# EAGLE board Prototype3 (EAGLE 7.1.0)
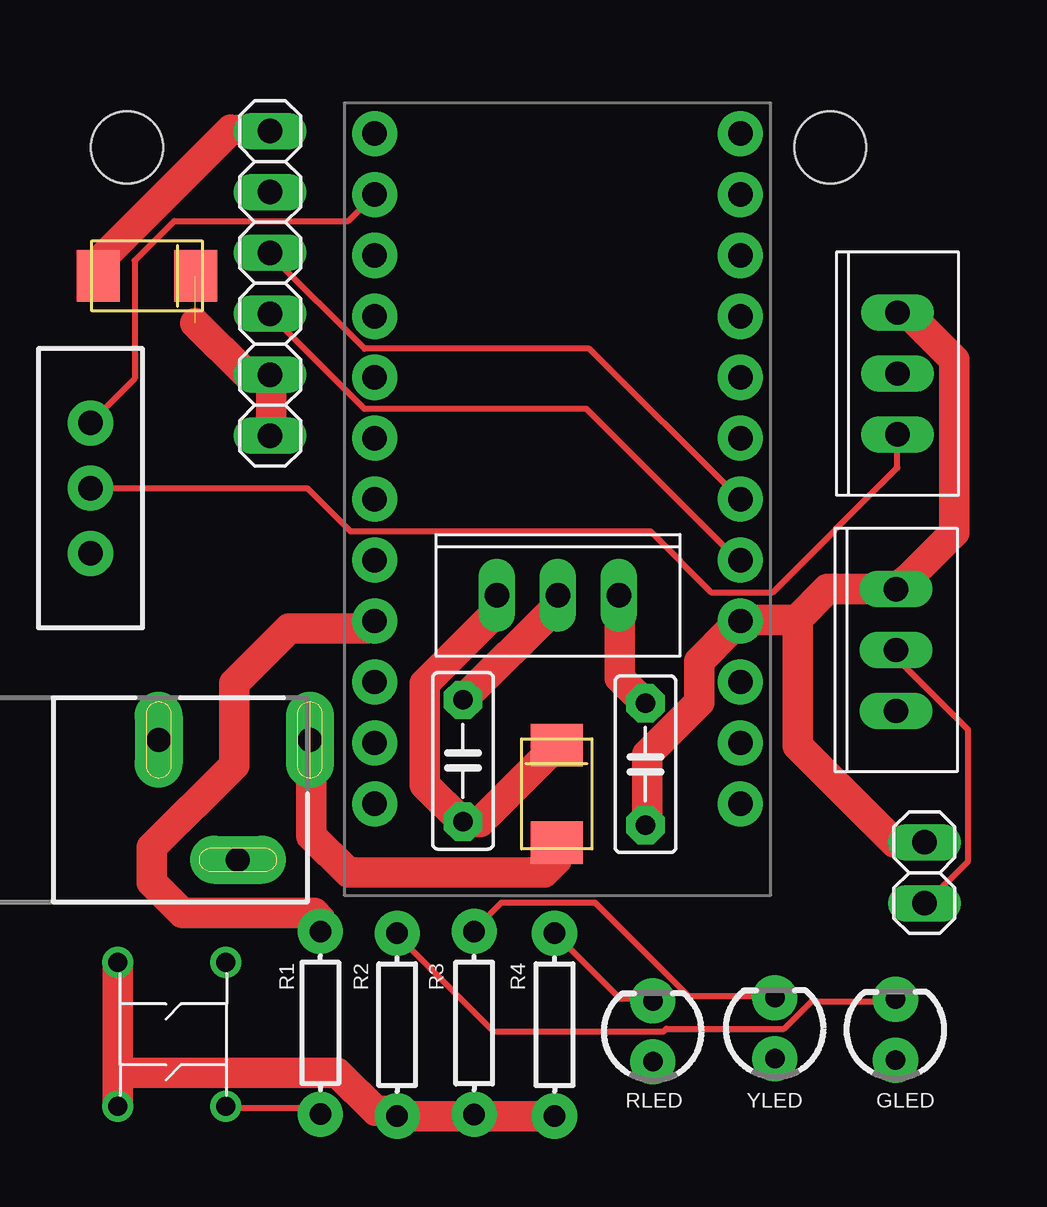
[diagram p0: board, top side]
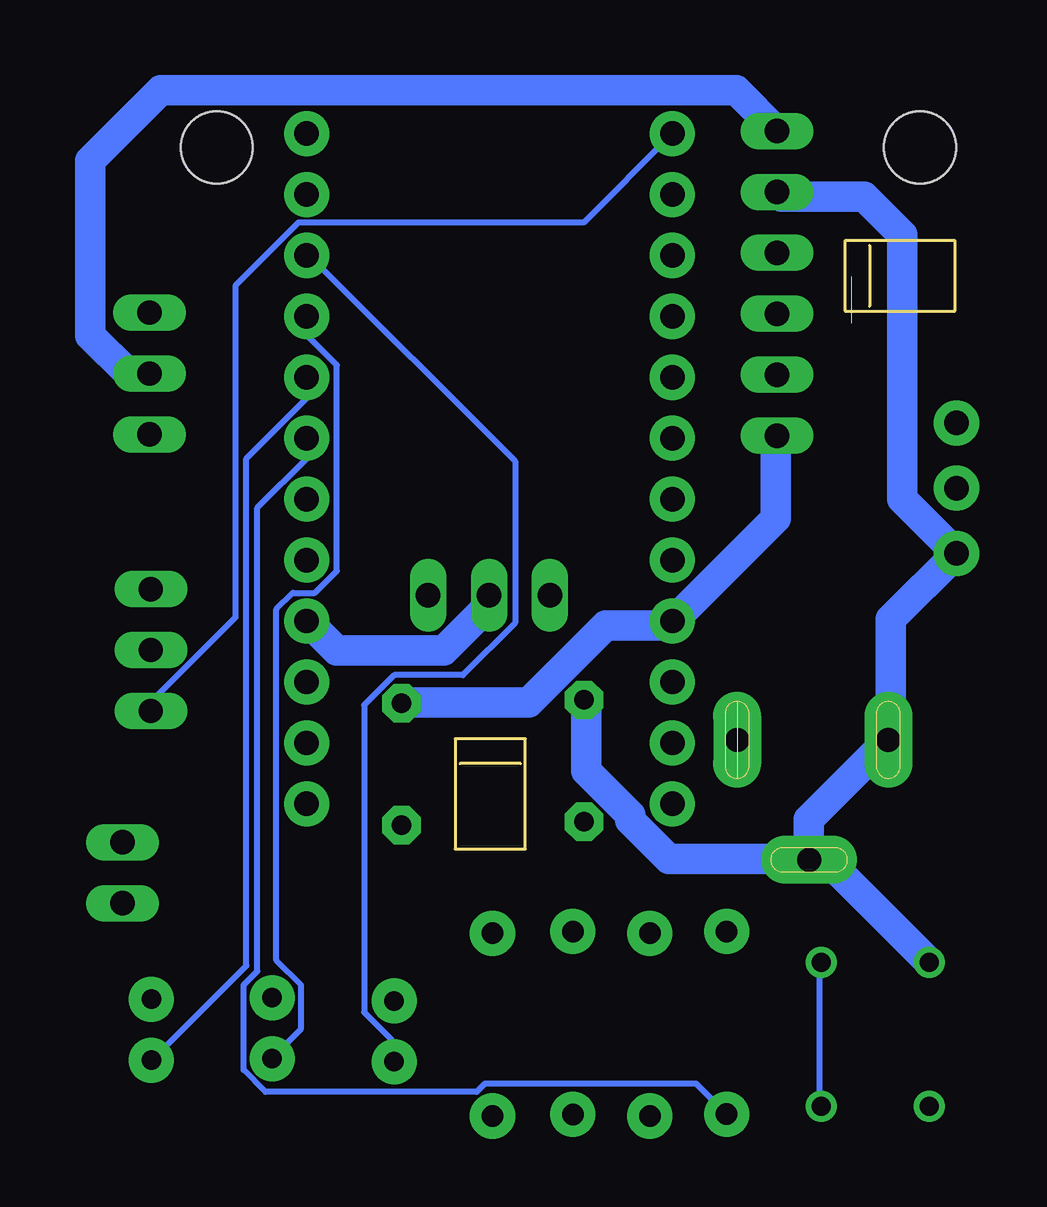
[diagram p1: board, bottom side, seen from below]

Size 20.83 x 25.36 mm. Coordinates in mm from the lower left corner, seen from the top.
Copper layers (1*16): Top 0.035mm / dielectric 1.5mm / Bottom 0.035mm
Design rules "default *": minimum track width 10mil, minimum drill 24mil, track to track 8mil, track to pad 4mil, pad to pad 8mil, via to via 8mil, smd to smd 8mil, copper to edge 0mil, drill to drill 8mil, minimum pad ring 10mil, minimum via ring 8mil, stop-mask expansion 4mil, vias tented up to drill 0mil, thermal gap 10mil
Net classes: 0 default: width 0.254 mm; 1 Power: width 1.27 mm
Holes 3 mm at 1.47,29.26 30.77,29.26

## Footprints (pad centres in the part's own frame; a part is rotated, then mirrored left to right if it is on the bottom)
C5B2.5 = drill 0.813 pad 1.6 octagon: 1 -2.54,0; 2 2.54,0
SMD-DIODE = smd 1.778 x 2.159: P$1 -2.032,0; P$2 2.032,0
LED3MM = drill 0.813 pad 1.88: A -1.27,0; K 1.27,0
TO-220(2) = drill 1.016 long: GND 0,0; IN -2.54,0; OUT 2.54,0
POWER_JACK_SLOT = drill 1 pad 2 long: GND@1 2.58,7.5; GND@2 7.58,10.8; PWR 2.58,13.8
1X02 = drill 1.016 long: 1 -1.27,0; 2 1.27,0
1X06 = drill 1.016 long: 1 -6.35,0; 2 -3.81,0; 3 -1.27,0; 4 1.27,0; 5 3.81,0; 6 6.35,0
AXIAL-0.3 = drill 0.9 pad 1.88: P$1 -3.81,0; P$2 3.81,0
SWITCH-SPDT_KIT = drill 1.016 pad 1.88: 1 0,2.718; 2 0,0; 3 0,-2.718
ARDUINO_MINI = drill 1.016 pad 1.88: 1 -7.62,12.7; 2 -7.62,10.16; 3 -7.62,7.62; 4 -7.62,5.08; 5 -7.62,2.54; 6 -7.62,0; 7 -7.62,-2.54; 8 -7.62,-5.08; 9 -7.62,-7.62; 10 -7.62,-10.16; 11 -7.62,-12.7; 12 -7.62,-15.24; 13 7.62,-15.24; 14 7.62,-12.7; 15 7.62,-10.16; 16 7.62,-7.62; 17 7.62,-5.08; 18 7.62,-2.54; 19 7.62,0; 20 7.62,2.54; 21 7.62,5.08; 22 7.62,7.62; 23 7.62,10.16; 24 7.62,12.7
PUSHBTTN = drill 0.8: P$1 2,-3; P$2 -2.5,-3; P$3 -2.5,3; P$4 2,3

## Placement (x,y rotation side)
C1  0.1uF  [C5B2.5]  23.07,3.54 270 top
C2  0.33uF  [C5B2.5]  15.47,3.68 90 top
D1  SCHOTTKY-DIODE  [SMD-DIODE]  19.37,2.3 90 top
GLED  [LED3MM]  33.49,-7.52 90 top  (outside the outline)
IC1  LM7805  [TO-220(2)]  19.42,10.58 0 top
J1  POWER_JACKSLT  [POWER_JACK_SLOT]  -4.71,7.13 270 top
JACK  [1X02]  34.69,-0.98 90 top  (outside the outline)
JP2  [1X06]  7.43,23.59 90 top
R1  [AXIAL-0.3]  9.53,-7.24 270 top  (outside the outline)
R2  [AXIAL-0.3]  12.72,-7.31 90 top  (outside the outline)
R3  [AXIAL-0.3]  15.93,-7.24 90 top  (outside the outline)
R4  [AXIAL-0.3]  19.28,-7.31 90 top  (outside the outline)
RLED  [LED3MM]  23.38,-7.59 90 top  (outside the outline)
S1  [SWITCH-SPDT_KIT]  -0.06,15.05 180 top
U$1  SCHOTTKY-DIODE  [SMD-DIODE]  2.3,23.9 0 top
U$2  ARDUINO_MINI  [ARDUINO_MINI]  19.4,14.59 180 top
U$3  PUSH-BUTTON  [PUSHBTTN]  3.08,-7.72 180 top  (outside the outline)
U$4  IRLZ34  [TO-220(2)]  33.57,19.82 90 top  (outside the outline)
U$5  IRLZ34  [TO-220(2)]  33.52,8.3 90 top  (outside the outline)
YLED  [LED3MM]  28.46,-7.46 90 top  (outside the outline)

## Library data of the parts
C1 C2 = capacitor-wima
D1 IC1 U$1 U$3-U$5 = gripper-lib
GLED RLED YLED = SparkFun-LED
J1 R1-R4 U$2 = SparkFun
JACK JP2 = pinhead
S1 = SparkFun-Electromechanical; PROD_ID: SWCH-08261

## Nets
CH_A: JP2.3 U$2.5
CH_B: JP2.4 U$2.6
GND [Power]: C1.2 C2.2 IC1.GND J1.GND@1 J1.GND@2 JACK.2 JP2.5 R2.P$1 R3.P$1 R4.P$1 S1.1 U$2.4 U$3.P$1 U$3.P$4 U$4.OUT U$5.OUT
J_PWM: U$2.13 U$5.IN
M- [Power]: JP2.6 U$1.P$1 U$4.GND
M_PWM: S1.3 U$2.14
N$1: JACK.1 U$5.GND
N$2: D1.P$1 J1.PWR
N$3: S1.2 U$4.IN
N$5 [Power]: C2.1 D1.P$2 IC1.IN
N$12: R4.P$2 RLED.K
N$13: R3.P$2 YLED.K
N$14: GLED.K R2.P$2
N$15: GLED.A U$2.8
N$16: U$2.9 YLED.A
N$17: RLED.A U$2.10
N$18: R1.P$2 U$2.7 U$3.P$2 U$3.P$3
VDD [Power]: C1.1 IC1.OUT JP2.1 JP2.2 R1.P$1 U$1.P$2 U$2.21

## Tracks (layer width: path | path; a pad name or v marks a point on that pad's centre or on a via)
CH_A
  Top 0.254: JP2.3 7.48,22.23 11.36,18.35 20.62,18.35 26.91,12.06 U$2.5
CH_B
  Top 0.254: JP2.4 7.48,24.75 11.36,20.86 20.74,20.86 26.91,14.69 U$2.6
GND
  Top 1.27: IC1.GND 19.36,10.57 19.36,10.12 15.48,6.23 C2.2 | U$4.OUT 33.65,22.35 33.99,22.35 35.94,20.4 35.94,13.2 33.99,11.26 U$5.OUT 30.65,10.84 29.37,9.56 | C1.2 23.14,1.09 23.14,3.94 25.31,6.12 25.31,7.83 26.57,9.09 U$2.4 27.07,9.56 29.37,9.56 | R4.P$1 19.25,-11.14 16.51,-11.14 R3.P$1 15.82,-11.14 12.73,-11.14 R2.P$1 12.16,-10.92 11.82,-10.92 10.22,-9.32 1.08,-9.32 | 1.08,-9.32 1.08,-4.74 U$3.P$1 | 1.08,-9.32 1.08,-10.69 U$3.P$4 | JACK.2 33.43,0.29 29.42,4.31 29.42,9.51 29.37,9.56
  Bottom 1.27: IC1.GND 19.48,10.57 19.48,10.12 21.31,8.29 25.76,8.29 26.91,9.43 U$2.4 | 6.11,-0.4 11.93,-0.4 13.53,1.2 13.53,1.43 15.36,3.26 15.36,6.12 C2.2 | 6.11,-0.4 J1.GND@2 5.35,-0.45 U$3.P$1 | JP2.5 7.23,27.2 3.79,27.2 2.2,25.61 2.2,14.58 S1.1 2.68,9.6 2.68,4.63 J1.GND@1 6.11,1.23 6.11,-0.4
J_PWM
  Bottom 0.254: U$5.IN 33.42,5.77 33.42,6.23 29.99,9.66 29.99,23.49 27.37,26.12 15.48,26.12 11.82,29.78 U$2.13
M-
  Top 1.27: JP2.6 5.8,30 0.32,24.52 0.37,24 U$1.P$1
  Bottom 1.27: U$4.GND 34.44,19.82 36.03,21.42 36.03,28.7 33.1,31.63 9.12,31.63 JP2.6
M_PWM
  Top 0.254: U$2.14 10.68,26.19 3.44,26.19 1.79,24.54 1.79,19.61 S1.3
N$1
  Top 0.254: U$5.GND 33.54,8.29 33.54,7.94 36.51,4.97 36.51,-0.51 34.79,-2.23 JACK.1
N$2
  Top 1.27: D1.P$1 19.37,-0.45 18.85,-0.97 10.68,-0.97 9.15,0.56 9.15,4.49 J1.PWR
N$3
  Top 0.254: S1.2 8.98,15.05 10.77,13.26 23.27,13.26 25.82,10.71 28.37,10.71 33.57,15.91 U$4.IN | U$4.IN
N$5
  Top 1.27: IC1.IN 16.85,10.57 16.85,9.89 13.88,6.92 13.88,2.69 15.36,1.2 C2.1 16.18,1.14 D1.P$2
N$12
  Top 0.254: RLED.K 23.36,-6.23 21.99,-6.23 19.36,-3.6 R4.P$2
N$13
  Top 0.254: YLED.K 28.39,-6.12 24.85,-6.12 20.96,-2.23 17.08,-2.23 15.94,-3.37 R3.P$2
N$14
  Top 0.254: GLED.K 33.42,-6.34 29.99,-6.34 28.85,-7.49 23.94,-7.49 23.82,-7.6 16.74,-7.6 12.73,-3.6 R2.P$2
N$15
  Bottom 0.254: U$2.8 27.02,19.6 27.02,18.8 29.54,16.29 29.54,-4.86 33.42,-8.74 GLED.A
N$16
  Bottom 0.254: U$2.9 26.91,22.12 26.91,21.32 25.76,20.17 25.76,11.6 26.68,10.69 27.59,10.69 28.28,10 28.28,-4.63 27.25,-5.66 27.25,-7.49 28.39,-8.63 YLED.A
N$17
  Bottom 0.254: RLED.A 23.48,-8.86 23.48,-7.94 24.62,-6.8 24.62,6 23.36,7.26 20.51,7.26 18.34,9.43 18.34,16.17 26.91,24.75 U$2.10
N$18
  Top 0.254: U$3.P$3 5.65,-10.8 9.19,-10.8 9.42,-11.03 R1.P$2
  Bottom 0.254: U$3.P$2 5.65,-4.74 5.65,-10.69 U$3.P$3 | U$2.7 27.02,17.09 27.02,16.29 29.08,14.23 29.08,-5.09 29.65,-5.66 29.65,-9.2 28.74,-10.12 19.94,-10.12 19.59,-9.77 10.79,-9.77 9.53,-11.03 R1.P$2
VDD  (1 unrouted)
  Top 1.27: IC1.OUT 21.99,10.57 21.99,7.14 23.02,6.12 C1.1 | JP2.1 7.48,17.32 7.48,19.72 JP2.2 6.47,19.78 4.31,21.94 | 4.31,23.87 U$1.P$2 | R1.P$1 9.53,-2.92 9.26,-2.65 3.77,-2.65 2.5,-1.38 2.5,0.07 5.93,3.5 5.93,6.91 8.23,9.21 11.48,9.21 U$2.21
  Bottom 1.27: JP2.1 7.48,17.2 7.48,13.77 11.71,9.54 U$2.21 12.39,9.32 14.56,9.32 17.76,6.12 23.02,6.12 C1.1

## Text on the board
Reference: Max Height 47.42mm | Max Width is 39mm | Hole Dist 29.3mm
tDocu: OmniGrip / Michael Lin | U3 | U1 | U2 | C2 | C1 | JACK